# Altium PCB New_Circuit.PcbDoc
Units mm, origin at the board's own origin, x right, y up, seen from the top; angles counter-clockwise.
Board outline 120 x 63 mm, 2 copper layers (Top Layer, Bottom Layer); 27 components, 18 nets, 63 pads, 0 vias.
Unrouted connection lines stored in the file: 2.
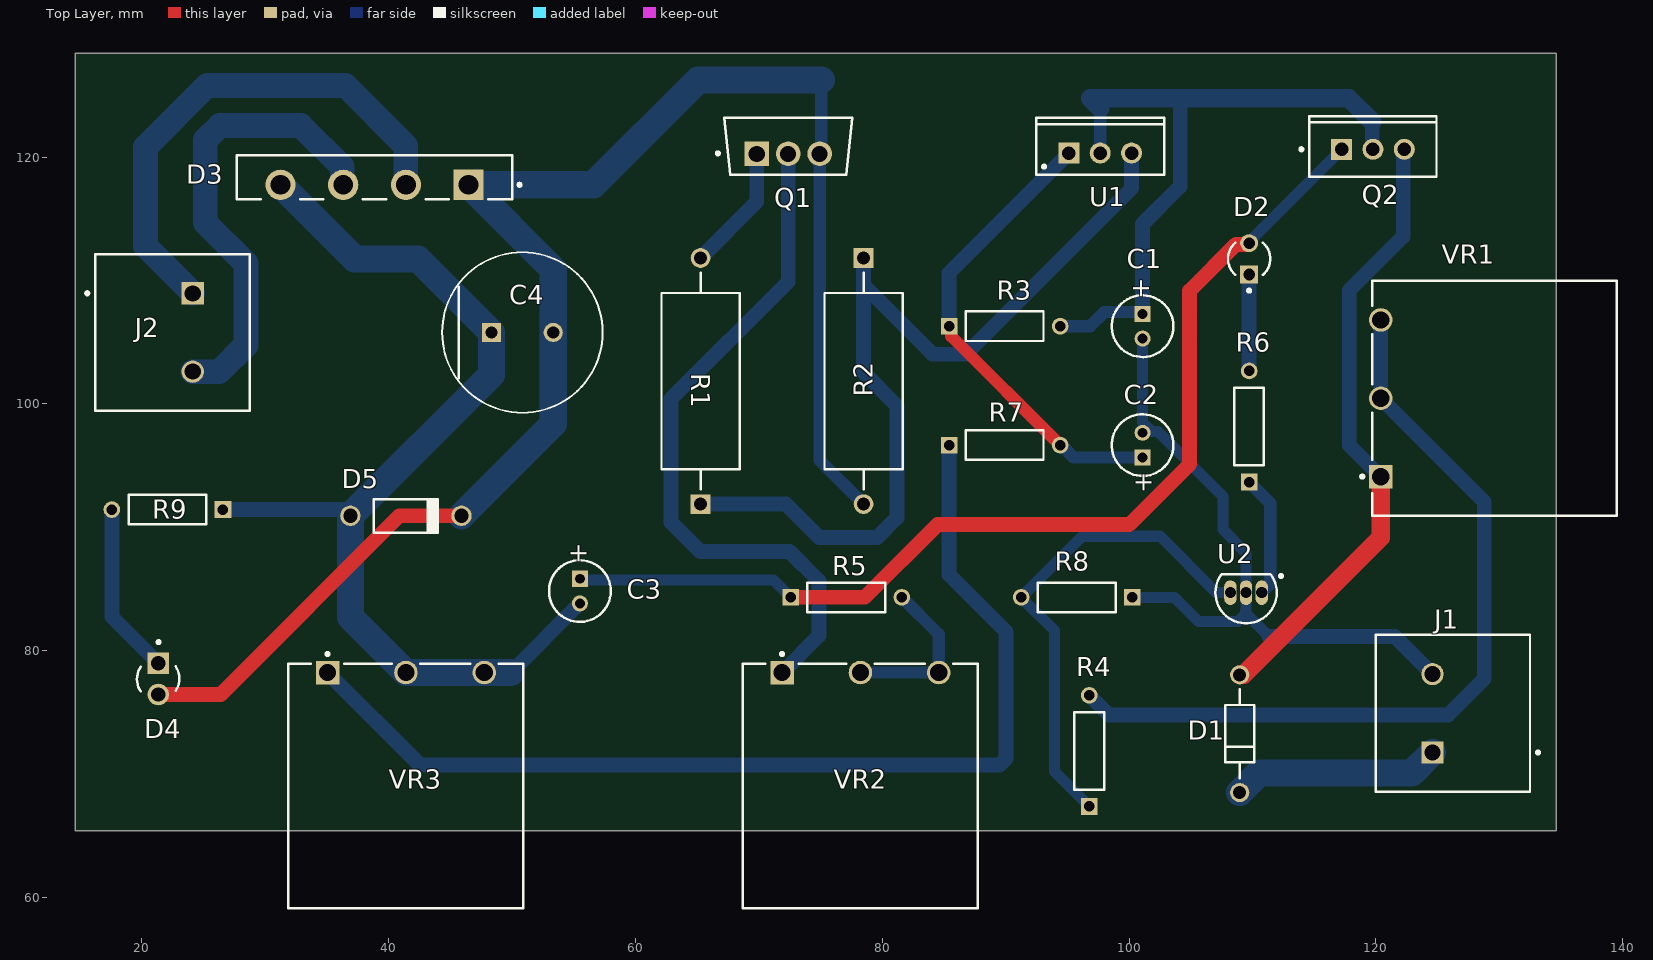
[diagram p0: Top Layer view]
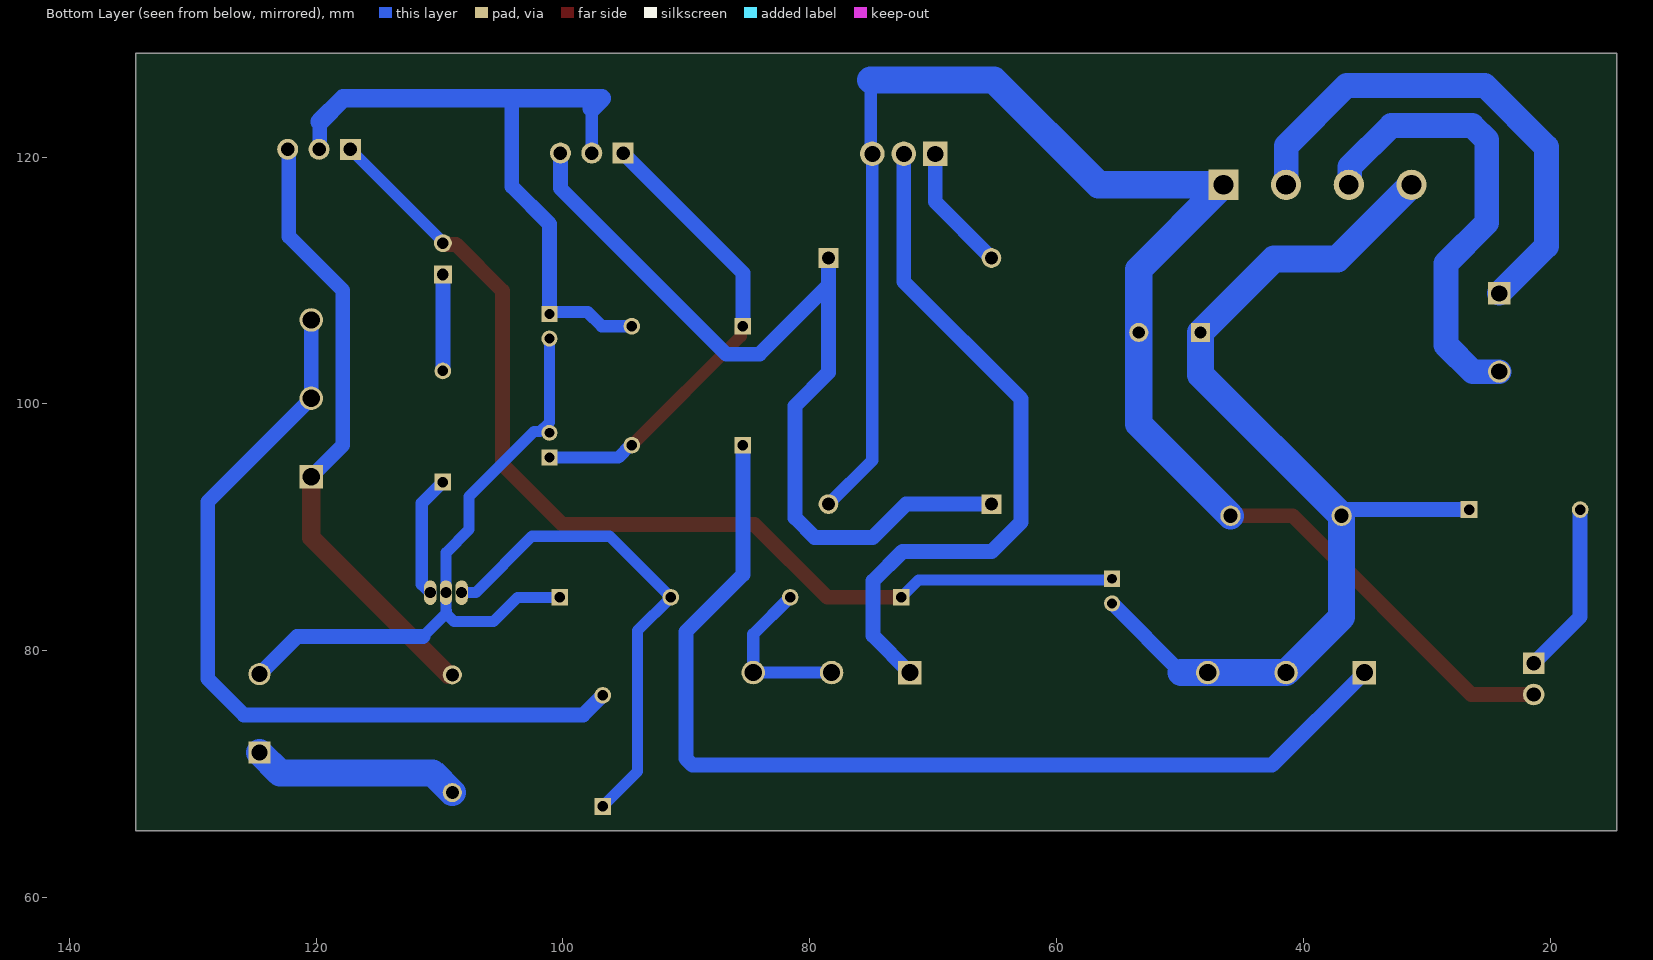
[diagram p1: Bottom Layer view, seen from below]

## Layer stack, top to bottom
Top Solder: solder mask 0.0102, Solder Resist, Dk 3.5
Top Layer: signal copper 0.0356
Dielectric 1: dielectric 0.32, FR-4, Dk 4.8
Bottom Layer: signal copper 0.0356
Bottom Solder: solder mask 0.0102, Solder Resist, Dk 3.5

## Board outline
14.62,65.405 14.62,128.405 134.62,128.405 134.62,65.405

## Design rules (kind name [scope] priority, off if disabled: settings)
Clearance Clearance_1 [InComponent('C3')  or InComponent('U2')] p1: gap=0.8 ignorepadtopadclearanceinfootprint=TRUE
Clearance [All] p2: gap=1 ignorepadtopadclearanceinfootprint=TRUE
PolygonConnect [All] p1: connectstyle=Relief reliefconductorwidth=0.254 reliefentries=4 polygonreliefangle="90 Angle" airgapwidth=0.254
RoutingVias [All] p1: holewidth=0.711 width=1.27 viastyle="Through Hole" minholewidth=0.711 minwidth=1.27 maxholewidth=0.711 maxwidth=1.27
SolderMaskExpansion [All] p1: expansion=0.102 istentingtop=FALSE
Width Width_HC [InNet('AC_IN_1')  Or InNet('30V') or InNet('AC_IN_2') or InNet('HC_1')] p1: maxlimit=2.2 minlimit=1 preferedwidth=1.5
Width [All] p2: maxlimit=2.2 minlimit=0.9 preferedwidth=1.2
30 further rules are at their usual default settings.

## Components (designator, comment, footprint, x,y, rotation, side; value= is the part's Value field where it differs from the comment)
C1 "47uF" CAPPR55-200-1100X500X1200 101.092,106.299 r270 top
C2 "10uF" CAPPR55-200-1100X500X1200 101.092,96.663 r90 top
C3 "10uF" CAPPR55-200-1100X500X1200 55.499,84.836 r270 top
C4 "2200uF" FP-RAD-TH-D_12_5_0_5-L_40-MFG 50.84,105.791 r0 top
D1 "1N5818" ONSC-AXIAL_LEAD-2-59-10_P 108.966,73.279 r90 top
D2 "HLMP-1301" FP-HLMP-1301-MFG 109.728,111.76 r90 top
D3 "D5SB60" FP-GBU-MFG 38.862,118.364 r0 top value=68pF
D4 "PWR_LED" FP-HLMP-1503-MFG 21.336,77.724 r270 top
D5 "1N4732A" FAIR-DO-41-2_V 41.402,90.932 r0 top
J1 "BATTERY" PHOE-1714955_V 124.587,74.93 r90 top
J2 "AC_IN" PHOE-1714955_V 24.13,105.791 r270 top
Q1 "TIP32C" FP-TO-220-P0A0015988-MFG 72.38,120.878 r90 top
Q2 "TIP120" ONSC-TO-220-3-221A-09 119.761,120.633 r90 top
R1 "220" FP-SP3A-MFG 65.278,101.854 r90 top
R2 "220" FP-SP3A-MFG 78.486,101.854 r270 top
R3 "220" RESA60-630X240 89.916,106.299 r0 top
R4 "82K" RESA60-630X240 96.774,71.882 r90 top
R5 "220" RESA60-630X240 77.089,84.328 r0 top
R6 "220" RESA60-630X240 109.728,98.171 r90 top
R7 "4.3K" RESA60-630X240 89.916,96.663 r0 top
R8 "10K" RESA60-630X240 95.758,84.328 r180 top
R9 "470" RESA60-630X240 22.08,91.44 r180 top
U1 "LM317T" TO-220 97.663,120.328 r0 top
U2 "TL431ACZ" TO-92 109.48,84.709 r90 top
VR1 "20K" BOUR-3852A-282-103AL-3_V 120.396,100.457 r90 top
VR2 "1K" BOUR-3852A-282-103AL-3_V 78.232,78.232 r0 top
VR3 "1K" BOUR-3852A-282-103AL-3_V 41.402,78.232 r0 top

## Footprints (in the part's own frame and the unit in brackets; to place one, negate y for a bottom-side part, rotate by r counter-clockwise, add the part's x,y. Pads: shape width x height; smd on the part's side, far side on the other; paste and mask are expansions set on the pad)
BOUR-3852A-282-103AL-3_V [mm] "TH, 3-Leads, Body 19.81x19.05mm, Pitch 6.35mm"
  rect 1.9x1.9 hole 1.4: 1(-6.35,0)
  round 1.9 hole 1.4: 2(0,0) 3(6.35,0)
  silkscreen extent -9.53,-19.11 9.53,1.62, body extent -9.52,-19.11 9.52,0.7, height 19.05
CAPPR55-200-1100X500X1200 [mm] "THD, 2-Leads, Dia 5mm, Body Length 11mm"
  rect 1.3x1.3 hole 0.8: 1(-1,0)
  round 1.3 hole 0.8: 2(1,0)
  silkscreen extent -2.5,-2.5 2.5,2.5, body extent -2.5,-2.5 2.5,2.5, height 12
FAIR-DO-41-2_V [mm] "2-Leads, Axial leaded, Body 2.72x5.2mm, Pin Spacing 9mm"
  round 1.65 hole 1.15: 1(-4.5,0) 2(4.5,0)
  silkscreen extent -2.6,-1.36 2.6,1.36, body extent -4.93,-1.36 4.93,1.36, height 2.71
FP-GBU-MFG [mm]
  rect 2.45x2.45 hole 1.6 paste-1000 mask+0: 1(7.62,-0.607)
  round 2.45 hole 1.6 paste-1000 mask+0: 2(2.54,-0.607) 3(-2.54,-0.607) 4(-7.62,-0.607)
  silkscreen extent -11.15,-1.78 11.88,1.78, body extent -11.25,-1.93 11.25,1.88, height 0.25
FP-HLMP-1301-MFG [mm]
  rect 1.45x1.45 hole 0.95 paste-1000 mask+0: 1(-1.27,0)
  round 1.45 hole 0.95 paste-1000 mask+0: 2(1.27,0)
  silkscreen extent -2.7,-1.71 1.3,1.71, body extent -2.22,-2.22 2.22,2.22, height 0.25
FP-HLMP-1503-MFG [mm]
  rect 1.75x1.75 hole 1.15 paste-1000 mask+0: 1(-1.27,0)
  round 1.75 hole 1.15 paste-1000 mask+0: 2(1.27,0)
  silkscreen extent -3.1,-1.73 1.02,1.71, body extent -2.42,-2.42 2.42,2.42, height 0.25
FP-RAD-TH-D_12_5_0_5-L_40-MFG [mm]
  rect 1.55x1.55 hole 1 paste-1000 mask+0: 1(-2.5,0)
  round 1.55 hole 1 paste-1000 mask+0: 2(2.5,0)
  silkscreen extent -6.5,-6.5 6.5,6.5, body extent -6.6,-6.6 6.6,6.6, height 0.25
FP-SP3A-MFG [mm]
  rect 1.6x1.6 hole 1.05 paste-1000 mask+0: 1(-9.973,0)
  round 1.6 hole 1.05 paste-1000 mask+0: 2(9.973,0)
  silkscreen extent -8.77,-3.16 8.77,3.16, body extent -10.87,-3.26 10.87,3.26, height 0.25
FP-TO-220-P0A0015988-MFG [mm]
  rect 2x2 hole 1.3 paste-1000 mask+0: 1(-0.607,2.55)
  round 2 hole 1.3 paste-1000 mask+0: 2(-0.607,0) 3(-0.607,-2.55)
  silkscreen extent -2.3,-5.2 2.3,5.82, body extent -2.4,-5.3 2.4,5.3, height 0.25
ONSC-AXIAL_LEAD-2-59-10_P [mm] "AXIAL, 2-Leads, Diameter 2.35mm"
  round 1.55 hole 1.05: 1(-4.77,0) 2(4.77,0)
  silkscreen extent -3.6,-1.18 3.6,1.18
ONSC-TO-220-3-221A-09 [mm] "FM, 3-Leads, Body 10.3x4.85mm, Pitch 2.54mm"
  rect 1.7x1.7 hole 1.1: 1(0,2.54)
  round 1.7 hole 1.1: 2(0,0) 3(0,-2.54)
  silkscreen extent -2.2,-5.15 2.69,5.92, body extent -2.18,-5.15 2.67,5.15, height 19.85
PHOE-1714955_V [mm] "Terminal Block, 2-Leads, Body 12.7x12.5mm, Pitch 6.35mm"
  rect 1.8x1.8 hole 1.3: 1(-3.175,0)
  round 1.8 hole 1.3: 2(3.175,0)
  silkscreen extent -6.35,-8.68 6.35,4.6, body extent -6.92,-7.9 6.35,4.6, height 21.51
RESA60-630X240 [mm] "Axial Resistor, 2-Leads, Dia 2.4mm, Body Length 6.3mm"
  rect 1.35x1.35 hole 0.85: 1(-4.5,0)
  round 1.35 hole 0.85: 2(4.5,0)
  silkscreen extent -3.15,-1.2 3.15,1.2, body extent -3.15,-1.2 3.15,1.2, height 2.4
TO-92 [mm] "TO, Flat Index; 3 In-Line, Axial Leads; Body Dia. 4.7mm; Lead Dia. 0.56 mm (max)"
  oval 2x1 hole 0.9: 1(0,-1.27) 2(0,0) 3(0,1.27)
  silkscreen extent -2.48,-2.96 1.5,2.48, body extent -2.48,-2.5 1.5,2.5, height 4.95
TO-220 [mm] "TO, Thru-Hole, Vertical, Heatsink Mounted; 3 In-Line Leads; Pitch 2.54 mm"
  rect 1.7x1.7 hole 1.1: 1(-2.54,0)
  round 1.7 hole 1.1: 2(0,0) 3(2.54,0)
  silkscreen extent -5.2,-1.75 5.2,2.85, body extent -5.25,-1.8 5.25,2.9, height 19.7

## Part data
C1: library part CMP-1665-00038-2, "Aluminum Electrolytic Capacitor, 10 uF, +/- 20%, 50 V, -40 to 85 degC, 2-Pin THD, RoHS, Bulk", Capacitance=10uF, Case/Package=Radial, Dielectric Material=Aluminium, Leakage Current=3uA, Manufacturer=Panasonic, Max Operating Temperature=85degC, Min Operating Temperature=-40degC, Package Description="2-Pin Radial Lead, Dia 5 mm, Height 12 mm", Package Quantity=200, Package Reference=CAPPR55-200-1100X500X1200, Ripple Current=65mA, Tolerance=20%, Voltage=50V, Datasheet URL=https://industrial.panasonic.com/cdbs/www-data/pdf/RDF0000/ABA0000C1218.pdf, Datasheet Version="Rev. 05, 10/2016", Diameter=5mm, Dissipation Factor=0.12%, Height=11mm, Height - Seated (Max)=0.472inch, Lead Diameter=0.5mm, Lead Free=LeadFree, Lead Pitch=2mm, Lead/Base Style=Straight, Length=11mm, Life (Hours)=2000Hour, Manufacturer URL=http://www.panasonic.com/, Mount=ThroughHole, Number of Pins=2, Packaging=Bulk, Radiation Hardening=No, REACH SVHC=NoSVHC, Ripple Current (AC)=65mA, RoHSCompliant=true, Termination=Radial, Voltage Rating=50V, Voltage Rating (DC)=50V
C2 C3: library part CMP-1665-00038-2, "Aluminum Electrolytic Capacitor, 10 uF, +/- 20%, 50 V, -40 to 85 degC, 2-Pin THD, RoHS, Bulk", Case/Package=Radial, Dielectric Material=Aluminium, Leakage Current=3uA, Manufacturer=Panasonic, Max Operating Temperature=85degC, Min Operating Temperature=-40degC, Package Description="2-Pin Radial Lead, Dia 5 mm, Height 12 mm", Package Quantity=200, Package Reference=CAPPR55-200-1100X500X1200, Ripple Current=65mA, Tolerance=20%, Voltage=50V, Capacitance=10uF, Datasheet URL=https://industrial.panasonic.com/cdbs/www-data/pdf/RDF0000/ABA0000C1218.pdf, Datasheet Version="Rev. 05, 10/2016", Diameter=5mm, Dissipation Factor=0.12%, Height=11mm, Height - Seated (Max)=0.472inch, Lead Diameter=0.5mm, Lead Free=LeadFree, Lead Pitch=2mm, Lead/Base Style=Straight, Length=11mm, Life (Hours)=2000Hour, Manufacturer URL=http://www.panasonic.com/, Mount=ThroughHole, Number of Pins=2, Packaging=Bulk, Radiation Hardening=No, REACH SVHC=NoSVHC, Ripple Current (AC)=65mA, RoHSCompliant=true, Termination=Radial, Voltage Rating=50V, Voltage Rating (DC)=50V
C4: library part CMP-05427-000828-1, "Aluminum Electrolytic Capacitors (Radial Lead Type) AEC-Q200 Qualified 2200uF ±20% 35V", Capacitance=2.2mF, Case/Package=Radial, Dielectric Material=Aluminium, Max Operating Temperature=105°C, Min Operating Temperature=-55°C, Package Quantity=100, Ratings=AEC-Q200, Ripple Current=3.01A, Tolerance=20%, Voltage=35V, Construction=RADIAL, Contact Plating=Tin, Diameter=12.5mm, Height=40mm, Impedance=14mR, Lead Diameter=0.8mm, Lead Pitch=5mm, Length=40mm, Life (Hours)=5000Hour, Mount="Through Hole", Number of Pins=2, Packaging=Bulk, Radiation Hardening=No, REACH SVHC="No SVHC", Series=FK, Termination=Radial, Voltage Rating=35V, Voltage Rating (DC)=35V
D1: library part CMP-1055-00034-1, "Rectifier, 2-Pin Axial_Lead, Pb-Free, Bulk Bag", Manufacturer="On Semiconductor", ComponentLink1Description="Manufacturer URL", ComponentLink1URL=http://www.onsemi.com/, ComponentLink2Description=Datasheet, ComponentLink2URL=http://www.onsemi.cn/pub_link/Collateral/1N5817-D.PDF, ComponentLink3Description="Package Specification", ComponentLink3URL=http://www.onsemi.cn/pub_link/Collateral/59-10.PDF, Configuration=Single, DatasheetVersion="Rev. 10", IFSM Max (A)=25, Mounting Technology="Through Hole", Note1=0, PackageDescription="2-Pin, Axial Lead, Diameter 2.35 mm", PackageReference=AXIAL_LEAD-2-59-10, PackageVersion="Rev. U, 02/2005", Packing="Bulk Bag", PartNumber=1N5818, RoHS=TRUE
D2: library part CMP-18399-000007-1, "LED RED DIFFUSED T-1 T/H", Colour=Red, Forward Current=10mA, Forward Voltage=1.9V, Manufacturer=Broadcom, Max Junction Temp=+110°C, Package=0, Reverse Voltage=5V, Temperature="-40°C to +100°C", Temperature Range High=+100°C, Temperature Range Low=-40°C, Automotive=No, Category=Diode, ComponentLink2Description=Datasheet, ComponentLink2URL=https://docs.broadcom.com/docs/AV02-1555EN, Device Class L1=Optoelectronics, Device Class L2=LEDs, Device Class L3=unset, Digikey Description="LED RED DIFFUSED T-1 T/H", Lead Free=Yes, Led Orientation=Straight, Luminous Intensity=3.4mcd, Manufacturer Part Number=HLMP-1301, Mouser Description="Standard LEDs - Through Hole Red Diffused 635nm 3.4mcd", Octopart=https://octopart.com/hlmp-1301-broadcom-71130345, Peak Emmision Wavelength=635nm, RoHS=TRUE, Viewing Angle=60°, Wavelength=626nm
D3: library part CMP-02540-000020-1, "BRIDGE RECT 1PHASE 800V 3.9A GBU", Capacitance=68pF, Forward Current=3.9A, Manufacturer=Vishay, Manufacturer Part Number=GBU8K-E3/45, Max Junction Temp=+150°C, Max Repetitive Reverse Voltage=800V, Max Surge Forward Current=200A, Package=GBU, Peak Reverse Current=5uA, Temperature="-55°C to +150°C", Temperature Range Low=-55°C, Automotive=No, Category=Diode, ComponentLink2Description=Datasheet, ComponentLink2URL=https://www.vishay.com/docs/88616/gbu8a.pdf, Device Class L1="Discrete Semiconductors", Device Class L2=Diodes, Device Class L3="Rectifier Diodes", Digikey Description="BRIDGE RECT 1PHASE 800V 3.9A GBU", Height=20.83mm, Lead Free=Yes, Mouser Description="Bridge Rectifiers 800 Volt 8.0 Amp Glass Passivated", Octopart=https://octopart.com/gbu8k-e3%2F45-vishay-42337698, RoHS=TRUE, Standoff Height=1.52mm, Temperature Range High=+150°C
D4: library part CMP-18399-000010-1, "LED GREEN DIFFUSED T-1 T/H", Colour=Green, Forward Current=10mA, Forward Voltage=2.1V, Manufacturer=Broadcom, Manufacturer Part Number=HLMP-1503, Max Junction Temp=+110°C, Reverse Voltage=5V, Temperature="-20°C to +100°C", Temperature Range High=+100°C, Temperature Range Low=-20°C, Automotive=No, Category=Diode, ComponentLink2Description=Datasheet, ComponentLink2URL=https://docs.broadcom.com/docs/AV02-1555EN, Device Class L1=Optoelectronics, Device Class L2=LEDs, Device Class L3=unset, Digikey Description="LED GREEN DIFFUSED T-1 T/H", Height=6.35mm, Lead Free=Yes, Led Orientation=Straight, Luminous Intensity=1mcd, Mouser Description="LED; Green; 1mcd; 0.115In.Dia.; T-1; 565nm; 25mA; 2.1V; 5V; GaP; -20degC; 100deg", Octopart=https://octopart.com/hlmp-1503-broadcom-71130371, Package=HLMP-1503, Peak Emmision Wavelength=565nm, RoHS=TRUE, Standoff Height=0.88mm, Viewing Angle=60°, Wavelength=569nm
D5: library part CMP-0892-00030-1, "Zener Diode, 4.7V, 1W, 5%, -65 to 200 degC, 2-Pin DO-41, Body 2.72 x 5.2 mm, RoHS", Manufacturer="Fairchild Semiconductor", Operating and Storage Temperature Range="-65 to 200 degC", Test Current IZ (mA)=53, Tolerance=5%, ComponentLink1Description="Manufacturer URL", ComponentLink1URL=http://www.fairchildsemi.com/, ComponentLink2Description=Datasheet, ComponentLink2URL=http://www.fairchildsemi.com/ds/1N/1N4744A.pdf, ComponentLink3Description="Package Specification", ComponentLink3URL=http://www.fairchildsemi.com/dwg/DO/DO41A.pdf, DatasheetVersion="Rev. H3", IR (uA)=10, Mounting Technology="Through Hole", PackageDescription="2-Pin Axial leaded, Body 2.72 x 5.2 mm, Lead Spread 25.4 mm", PackageReference=DO-41-2, PackageVersion="Rev. 2", PartNumber=1N4732A, PD (W)=1, RoHS=TRUE, VZ (Max.) (V)=4.935, VZ (Min.) (V)=4.465, ZZ (Max) (ohm)=8
J1 J2: library part CMP-2000-05797-1, "PC Terminal Block, Pitch 6.35 mm, 1 x 2 Position, Height 21.5 mm, Tail Lenght 5.1 mm, RoHS, Bulk", Manufacturer="Phoenix Contact", Package Description="PC Terminal Block, Pitch 6.35 mm, 1 x 2 Position, Height 21.5 mm, Tail Lenght 5.1 mm", Package Reference=1714955, Datasheet URL=http://media.digikey.com/pdf/Data%20Sheets/Phoenix%20Contact%20PDFs/1714955.pdf, Datasheet Version=02/2010, Manufacturer URL=http://www.phoenixcontact.com/, Mounting Technology=ThroughHole
Q1: library part CMP-12195-000005-1, "TRANS PNP 100V 3A TO-220", Collector Base Voltage=-100V, Collector Emitter Saturation Voltage=-1.2V, Emitter Base Voltage=-5V, Manufacturer=STMicroelectronics, Max Collector Current=-3A, Max Junction Temp=+150°C, Package=TO-220-P0A0015988, Power Dissipation=2W, Temperature="to +150°C", Automotive=No, Category=Trans, Collector Emitter Voltage=-100V, ComponentLink2Description=Datasheet, ComponentLink2URL=https://www.st.com/resource/en/datasheet/tip32c.pdf, Device Class L1="Discrete Semiconductors", Device Class L2=Transistors, Device Class L3=BJTs, Digikey Description="TRANS PNP 100V 3A TO-220", Height=19.68mm, Hfe Max=50, Hfe Min=10, Hfe Testic=-3A, Hfe Testvce=-4V, Lead Free=Yes, Manufacturer Part Number=TIP32C, Mouser Description="Original ST Microelectronics Transistor, 100V, 3A, .22 Ohm, TO-220 Package", Number of Elements=1, Number Of Pnp=1, Octopart=https://octopart.com/tip32c-stmicroelectronics-353617, RoHS=TRUE, Standoff Height=3.5mm, Temperature Range High=+150°C
Q2: library part CMP-1047-00140-1, "Plastic Medium-Power, Complementary Silicon Transistor, 3-Pin TO-220, Tube", Manufacturer="On Semiconductor", ComponentLink1Description="Manufacturer URL", ComponentLink1URL=http://www.onsemi.com/, ComponentLink2Description=Datasheet, ComponentLink2URL=http://www.onsemi.cn/pub_link/Collateral/TIP120-D.PDF, ComponentLink3Description="Package Specification", ComponentLink3URL=http://www.onsemi.com/pub_link/Collateral/221A-09.PDF, DatasheetVersion="Rev. 8", IC Continuous (A)=5, Mounting Technology="Through Hole", PackageDescription="3-Pin Flange Mount, Vertical Straight Lead, Body 9.97 x 4.445 mm, Pitch 2.54 mm", PackageReference=TO-220-3-221A-09, PackageVersion="Rev. AG, 09/2011", Packing=Tube, PartNumber=TIP120, Polarity=NPN, RoHS=FALSE
R1 R2: library part CMP-26528-000004-1, "RES 10 OHM 5% 4W AXIAL", Case/Package=Axial, Max Operating Temperature=350°C, Max Power Dissipation=4W, Min Operating Temperature=-55°C, Package Quantity=1, Resistance=10R, Resistor Type=Wirewound, Temperature Coefficient=20ppm/°C, Tolerance=5%, Diameter=5.5mm, Length=12.7mm, Mount="Through Hole", Number of Terminations=2, Packaging="Cut Tape", Power Rating=4W, RoHS Compliant=Yes, Series=SP
R3 R4 R5 R6 R7 R8 R9: library part CMP-1659-00075-1, "Axial Resistor, 1 KOhm, +/- 1%, 250 mW, -55 to 155 degC, 2-Pin THD, RoHS, Bulk", Case\Package=Axial, Max Operating Temperature="155 degC", Min Operating Temperature="-55 degC", Package Quantity=200, Power Rating="250 mW", Resistance="10 kohm", Tolerance=1%, Voltage Rating="250 V", ComponentLink1Description="Manufacturer URL", ComponentLink1URL=http://www.yageo.com/, ComponentLink2Description=Datasheet, ComponentLink2URL=http://www.yageo.com/documents/recent/Yageo%20LR_MFR_2013.pdf, DatasheetVersion=Apr-13, Length="0.248 inch", PackageDescription="2-Pin Axial Lead, Dia 2.4 mm, Body Length 6.3 mm", PackageReference=MFR-25, Packaging=Bulk, RoHSCompliant=true
U1: library part CMP-0244-00444-1, "1.5A, 1.2V to 37V Adjustable Voltage Regulator, 3-Pin TO-220", ComponentLink1Description="Manufacturer URL", ComponentLink1URL=http://www.st.com, ComponentLink2Description=Datasheet, ComponentLink2URL=http://www.st.com/internet/com/TECHNICAL_RESOURCES/TECHNICAL_LITERATURE/DATASHEET/CD00000455.pdf, ComponentLink3Description="Package Specification", ComponentLink3URL=http://www.st.com/internet/com/TECHNICAL_RESOURCES/TECHNICAL_LITERATURE/PACKAGE_INFORMATION/CD00004649.pdf, DatasheetVersion=1/11/2011, PackageDescription="TO, Thru-Hole, Vertical, Heatsink Mounted; 3 In-Line Leads; Pitch 2.54 mm", PackageReference=TO-220, PackageVersion=2011
U2: library part CMP-0242-00006-1, "Programmable Voltage Reference, 2.5 to 36V, 3-Pin TO-92", ComponentLink1Description="Manufacturer URL", ComponentLink1URL=http://www.st.com, ComponentLink2Description=Datasheet, ComponentLink2URL=http://www.st.com/internet/com/TECHNICAL_RESOURCES/TECHNICAL_LITERATURE/DATASHEET/CD00000986.pdf, DatasheetVersion=Oct-2011, PackageDescription="TO, Flat Index; 3 In-Line, Axial Leads; Body Dia. 4.7mm; Lead Dia. 0.56 mm (max)", PackageReference=TO-92, PackageVersion=2011
VR1 VR2 VR3: library part CMP-2000-05079-1, "Diameter Panel Control, 10 KOhm, +/- 10%, 2 W, -1 to 125 degC, 3-Pin THD, RoHS, Bulk", Manufacturer=Bourns, Power (Watts)=2W, Resistance (Ohms)=10k, Resistive Material=Cermet, Standard Package=45, Temperature Coefficient=±150ppm/degC, Tolerance=±10%, Actuator Diameter="0.250\"(6.35mm)", Actuator Length="0.875\"(22.23mm)", Actuator Type=Slotted, Associated Product="36-8560-ND / -KNOBINSTRUMW/DIALRND.9\"DIA / 36-8555-ND / -KNOBINSTRUMSKIRTEDRND.7\"DIA / 36-8556-ND / -KNOBINSTRUMSKIRTEDRND.9\"DIA / 36-8565-ND / -KNOBINSTRUMDBLBARRND.7\"DIA / 36-8566-ND / -KNOBINSTRUMDBLBARRND.9\"DIA / 36-8568-ND / -KNOBINSTRUMSGLBARRND.7\"DIA / 36-8569-ND / -KNOBINSTRUMSGLBARRND.9\"DIA / 36-8559-ND / -KNOBINSTRUMW/DIALRND.7\"DIA / 226-1006-ND / -KNOBBLKGLOSS.75\"DIA.250\"SHAFT / 226-1007-ND / -KNOBBLKGLOSS.925\"DIA.250\"SHAFT / 226-1011-ND / -KNOBBLKGLOS", Built in Switch=None, Bushing Thread=3/8-32, Catalog Drawings="3852SeriesSide1 /  / 3852SeriesSide2", Category=Potentiometers,VariableResistors, Datasheet URL=https://datasheet.ciiva.com/11831/0900766b80f93b4b-11831016.pdf, Datasheet Version=Sep-14, Family=RotaryPotentiometers,Rheostats, Manufacturer URL=http://www.bourns.com/, Mounting Type=PanelMount, Number of Gangs=1, Number of Turns=1, Online Catalog=3852and3856Series, Other Names=3852A282103AL, Packaging=Bulk, PCN Design/Specification=PBTResinJun/2011, PCN Other=MultipleChanges01/Dec/2012, RoHS Information=3852A-LMaterialDeclaration, Rotation=280deg, Series=3852, Taper=Linear, Termination Style=SolderLug

## Nets (pads, with @x,y where several pads share a name; then routed paths per layer and width w, separated by ;. In a path a pad name is that pad's centre, name@x,y a point inside that pad or via, vN(x,y) a via of type N, cw(c..) or ccw(c..) an arc to the next point about the centre after c; other vN are vias at no path point)
30V: C4.2 D3.1 D4.2 D5.2 Q1.3 R2.2 | length 131.3
  Top Layer w1.2: D4.2 26.394,76.454 40.872,90.932 D5.2
  Bottom Layer w1: 75.057,126.238 75.057,120.397 Q1.3 74.93,95.437 R2.2
  Bottom Layer w2.2: D5.2 53.34,98.37 53.34,110.899 D3.1 56.591,117.757 65.073,126.238 75.057,126.238
AC_IN_1: D3.2 J2.1 | length 41.8
  Bottom Layer w2: J2.1 20.307,112.789 20.307,120.816 25.3,125.809 36.497,125.809 41.402,120.904 D3.2
AC_IN_2: D3.3 J2.2 | length 37.6
  Bottom Layer w2: J2.2 26.289,102.616 28.448,104.775 28.448,111.379 25.146,114.681 25.146,121.383 26.318,122.555 32.893,122.555 36.236,119.212 36.236,117.843 D3.3
GND: C1.2 C2.2 C3.2 C4.1 D3.4 D5.1 J1.2 R8.1 R9.1 U2.2 VR3.2 VR3.3 | length 136.7
  Bottom Layer w0.9: R8.1 103.674,84.328 105.643,82.359 108.835,82.359 109.48,83.004 ; C1.2 101.092,98.515 101.844,97.763 102.343,97.763 107.603,92.503 107.603,89.817 109.48,87.94 U2.2 109.48,83.292 109.445,83.257 109.48,83.221 109.48,83.004 ; 111.331,81.153 109.48,83.004
  Bottom Layer w1.2: R9.1 36.272,91.44 36.78,90.932 D5.1 ; 49.895,78.232 C3.2 ; 111.331,81.153 121.539,81.153 J1.2
  Bottom Layer w2.2: D3.4 37.249,111.75 42.381,111.75 C4.1 48.34,102.37 D5.1 36.902,82.732 VR3.2 49.895,78.232
HC_1: C1.1 Q1.2 Q2.2 R3.2 U1.2 VR2.1 | length 112.2
  Bottom Layer w1: R3.2 96.845,106.299 97.995,107.449 100.33,107.449 ; U1.2 97.663,123.952
  Bottom Layer w1.2: VR2.1 74.864,81.214 74.864,85.666 72.488,88.042 65.254,88.042 62.878,90.418 62.878,100.408 72.38,109.91 Q1.2 ; C1.1 101.092,114.579 104.14,117.627 104.14,124.757 ; Q2.2@119.701,120.703 119.701,122.869
  Bottom Layer w1.5: 97.663,123.952 96.858,124.757 104.14,124.757 117.813,124.757 119.701,122.869 ; Q2.2@119.701,120.703 119.761,120.643 Q2.2
NetC2_1: C2.1 R3.1 R7.2 U1.1 | length 38.5
  Top Layer w1: R3.1 85.591,106.124 85.591,105.488 R7.2
  Bottom Layer w1: R7.2 94.511,96.663 95.511,95.663 C2.1
  Bottom Layer w1.2: R3.1 85.416,110.621 U1.1
NetC3_1: C3.1 D2.2 Q2.1 R5.1 | length 85.7
  Top Layer w1.2: R5.1 78.584,84.328 84.481,90.225 100.004,90.225 104.902,95.123 104.902,109.165 108.662,112.925 109.623,112.925 D2.2
  Bottom Layer w0.9: C3.1 55.599,85.736 64.803,85.736 71.181,85.736 R5.1 ; D2.2 109.728,113.14 Q2.1
NetD1_1: D1.1 J1.1 | length 17
  Bottom Layer w2.2: D1.1 110.561,70.104 122.936,70.104 J1.1
NetD1_2: D1.2 Q2.3 VR1.1 | length 50.4
  Top Layer w1.5: D1.2 108.976,78.059 109.279,78.059 120.396,89.176 VR1.1
  Bottom Layer w1.2: VR1.1 117.846,96.657 117.846,109.21 122.211,113.575 122.211,120.543 Q2.3
NetD2_1: D2.1 R6.2 | length 7.8
  Bottom Layer w1.2: R6.2 D2.1
NetD4_1: D4.1 R9.2 | length 14
  Bottom Layer w1.2: R9.2 17.58,82.75 D4.1
NetQ1_1: Q1.1 R1.2 | length 10.3
  Bottom Layer w1.2: R1.2 69.83,116.379 Q1.1
NetR1_1: R1.1 R2.1 U1.3 | length 72.3
  Bottom Layer w1.2: R1.1 72.203,91.881 74.903,89.181 79.604,89.181 81.186,90.763 81.186,99.845 78.486,102.545 78.486,109.616 ; R2.1 78.486,109.616 ; U1.3 100.203,117.473 86.754,104.024 84.078,104.024 78.486,109.616
NetR4_1: R4.1 R8.2 U2.3 | length 40.1
  Bottom Layer w0.9: R4.1 93.947,70.209 93.947,81.639 R8.2 96.211,89.281 102.489,89.281 107.061,84.709 U2.3
NetR4_2: R4.2 VR1.2 VR1.3 | length 66.4
  Bottom Layer w1.2: R4.2 98.353,74.803 125.857,74.803 128.778,77.724 128.778,92.075 VR1.2 VR1.3
NetR5_2: R5.2 VR2.2 VR2.3 | length 13.7
  Bottom Layer w1: VR2.2 VR2.3 84.582,81.335 R5.2
NetR6_1: R6.1 U2.1 | length 9.9
  Bottom Layer w1: R6.1 111.43,91.969 111.43,85.389 U2.1
NetR7_1: R7.1 VR3.1 | length 85.6
  Bottom Layer w1.2: VR3.1 42.545,70.739 89.513,70.739 90.04,71.266 90.04,81.54 85.416,86.164 R7.1

## Text inside footprints (layer, text, board x,y; h text height)
C1: Top Overlay "+" at 100.355,110.207 h1.5 r270
C2: Top Overlay "+" at 101.829,92.755 h1.5 r90
C3: Top Overlay "+" at 54.762,88.744 h1.5 r270